# EAGLE board Swarm_Serial_Breakout-Panel (EAGLE 9.6.2), part 1 of 2
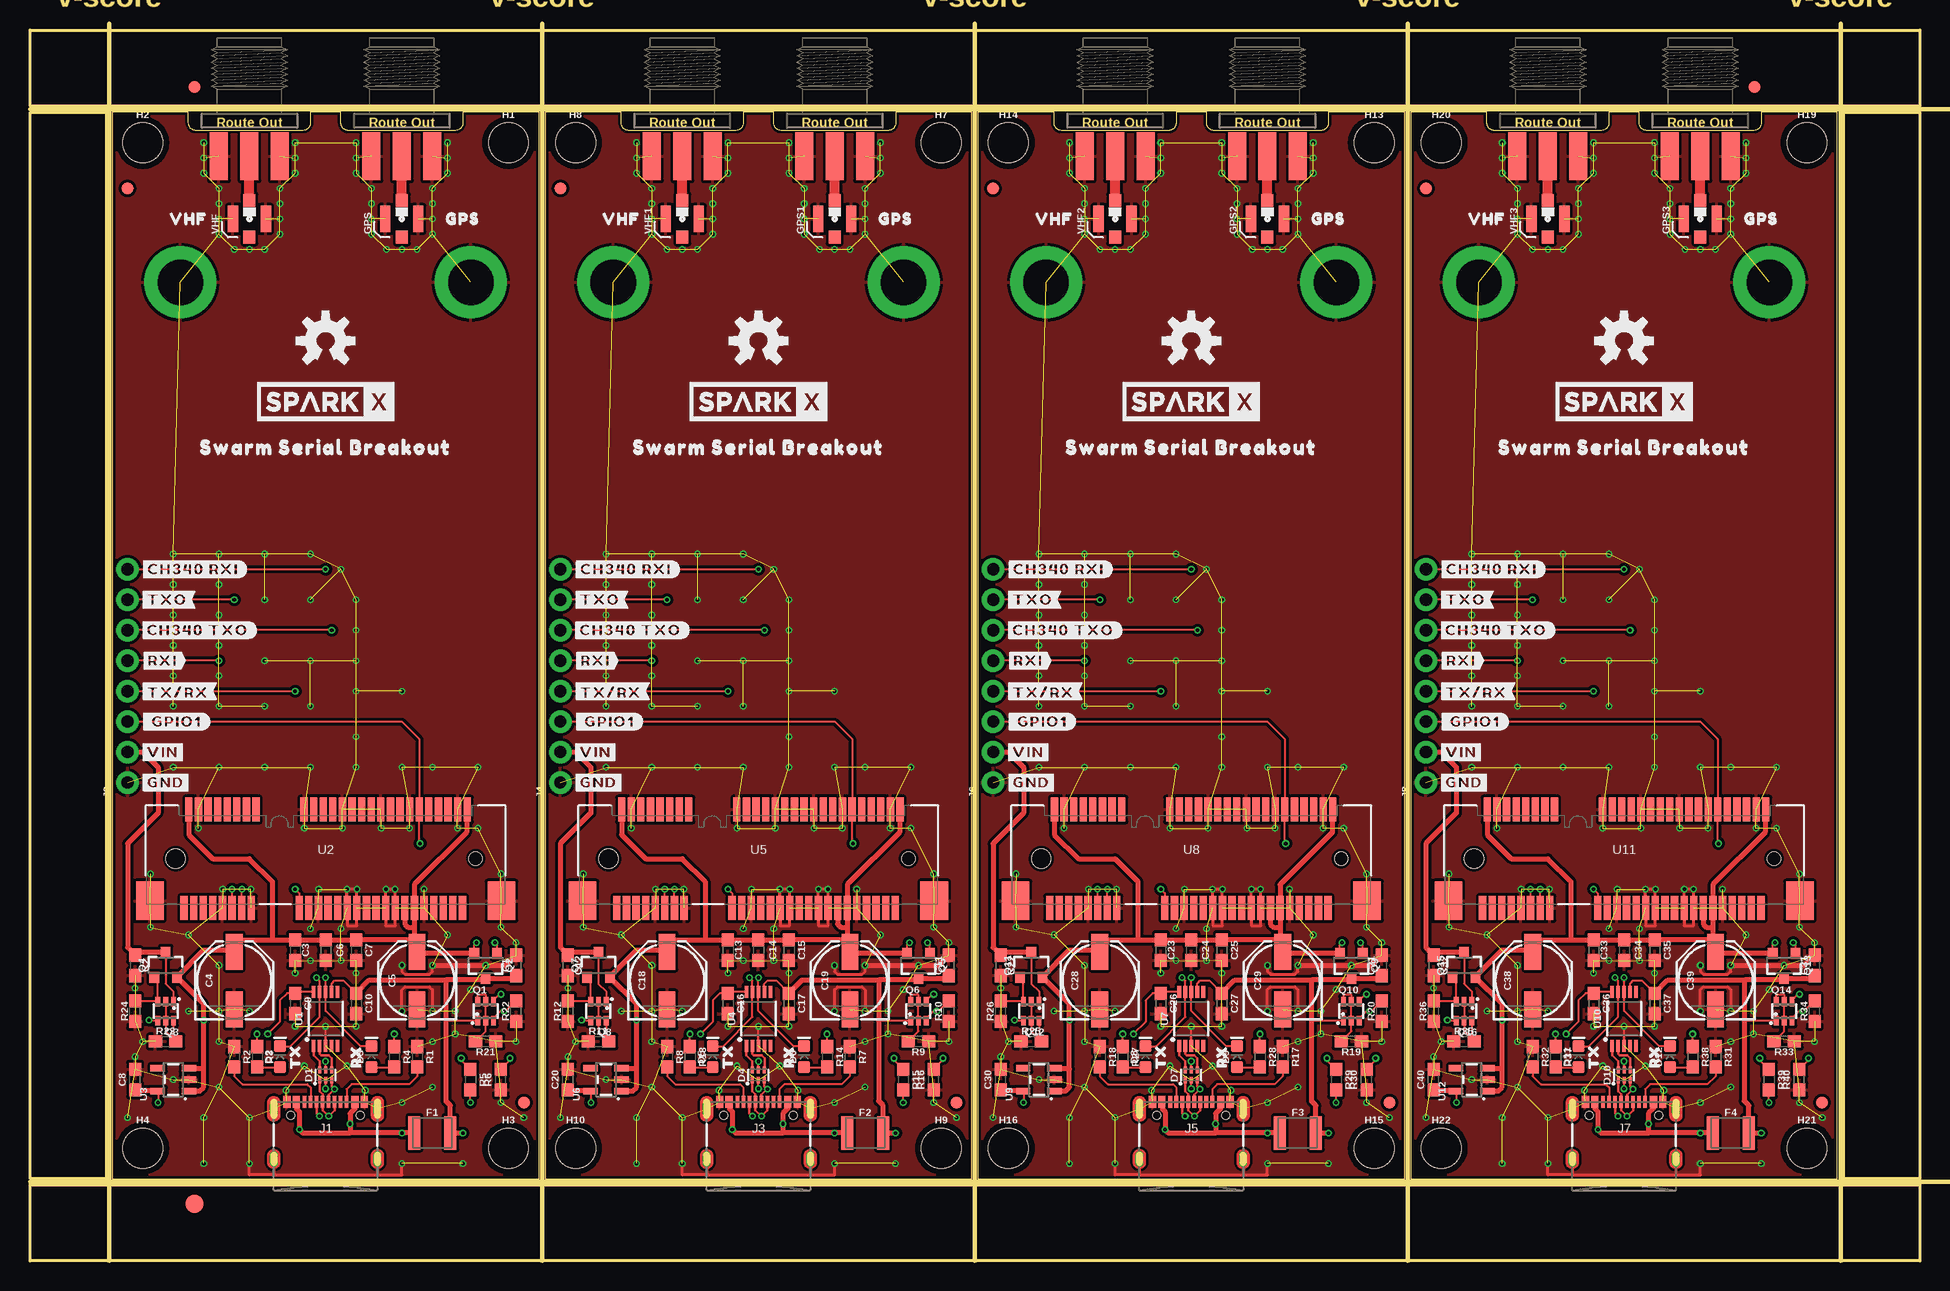
[diagram p0: board, top side]
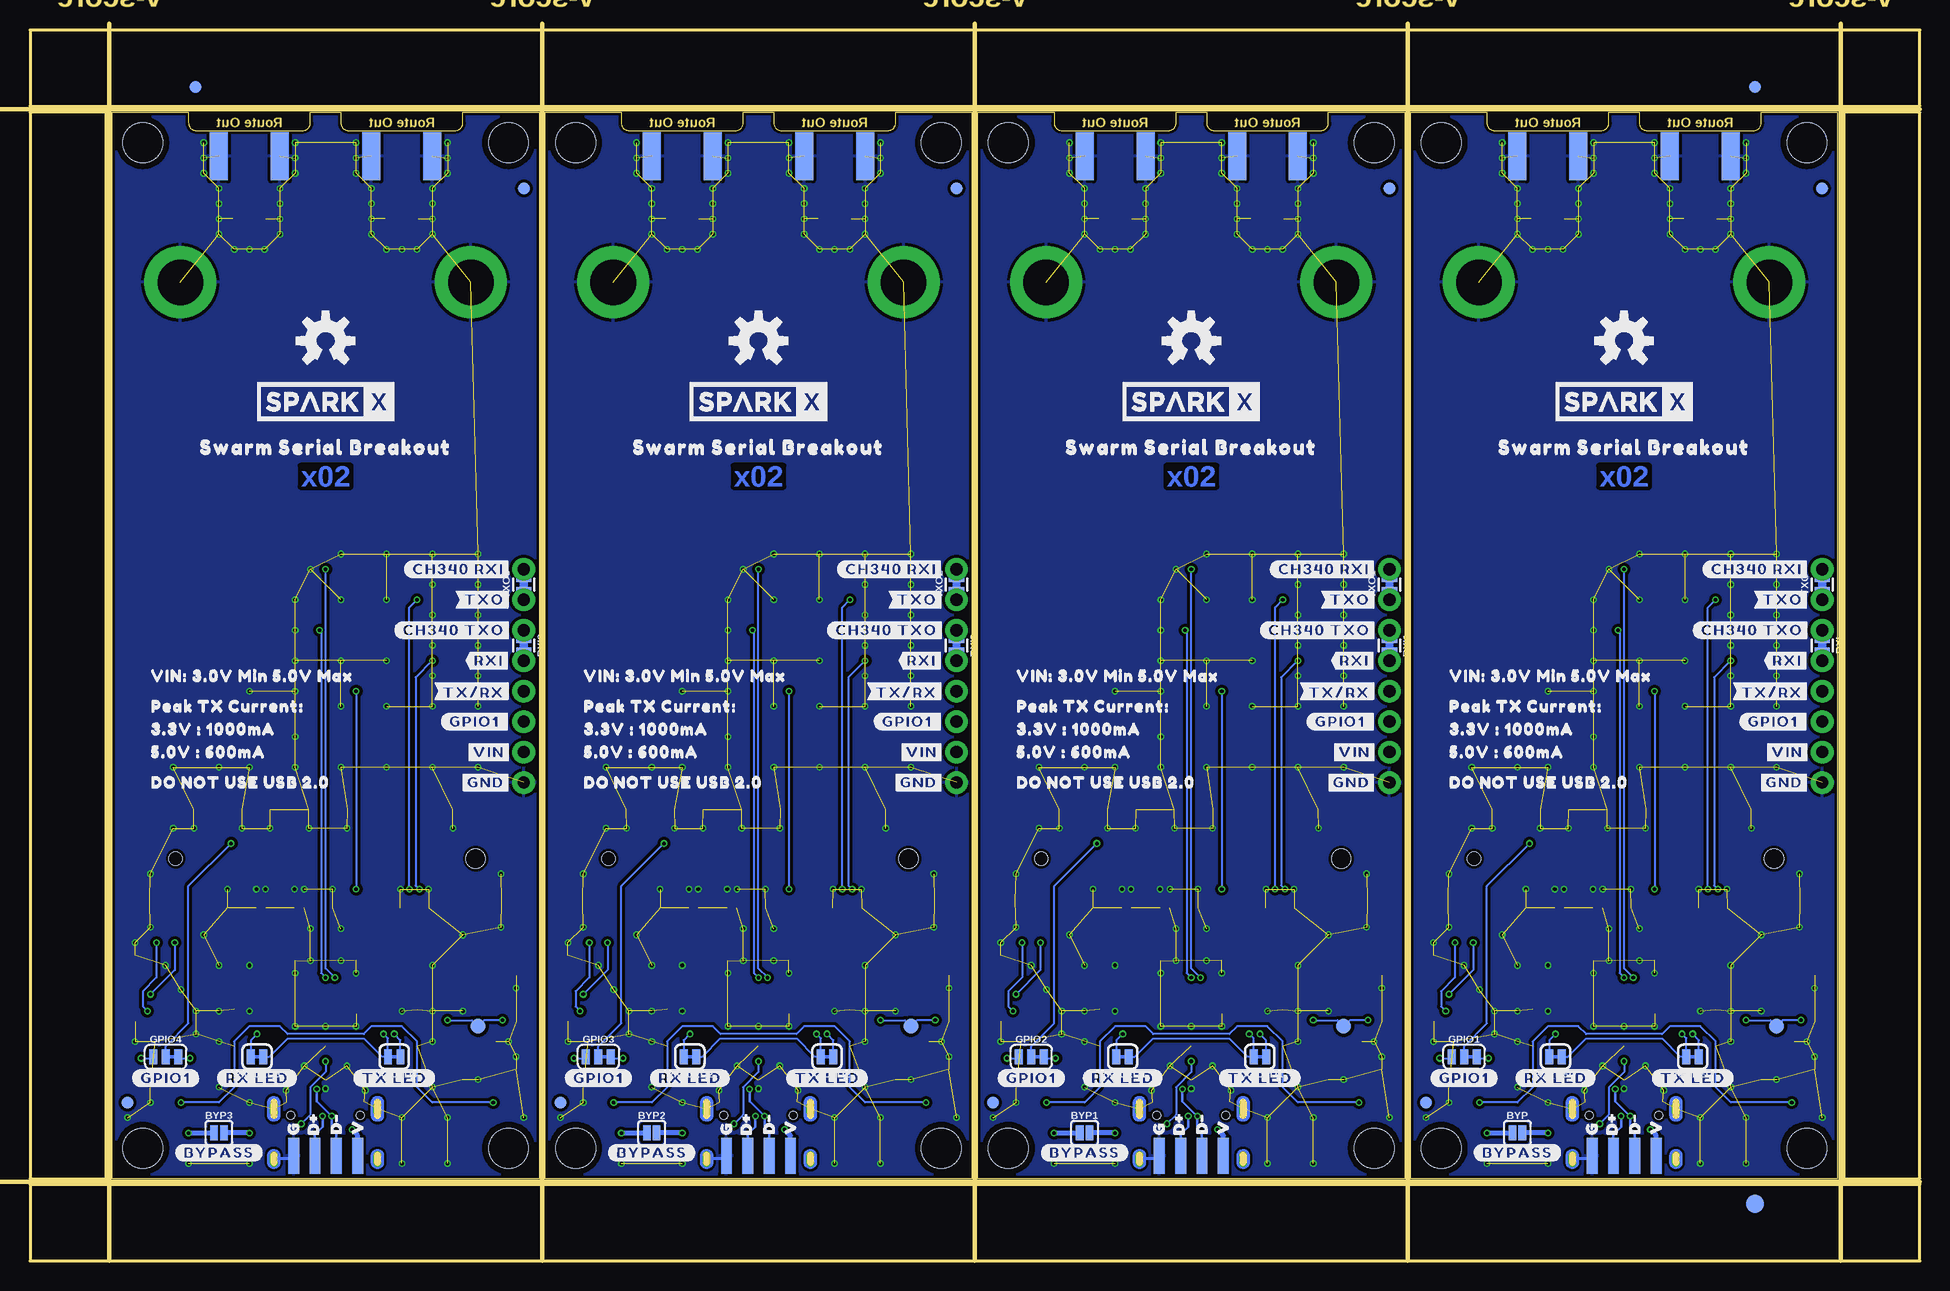
[diagram p1: board, bottom side, seen from below]

Size 157.48 x 102.62 mm. Coordinates in mm from the lower left corner, seen from the top.
Outline: 6.86,6.86 42.42,6.86 42.42,95.76 36.07,95.76 36.07,94.87 arc-90 35.43,94.23 26.54,94.23 arc-90 25.91,94.87 25.91,95.76 23.37,95.76 23.37,94.87 arc-90 22.73,94.23 13.84,94.23 arc-90 13.21,94.87 13.21,95.76 6.86,95.76 6.86,6.86
Outline: 42.93,6.86 78.49,6.86 78.49,95.76 72.14,95.76 72.14,94.87 arc-90 71.5,94.23 62.61,94.23 arc-90 61.98,94.87 61.98,95.76 59.44,95.76 59.44,94.87 arc-90 58.8,94.23 49.91,94.23 arc-90 49.28,94.87 49.28,95.76 42.93,95.76 42.93,6.86
Outline: 78.99,6.86 114.55,6.86 114.55,95.76 108.2,95.76 108.2,94.87 arc-90 107.57,94.23 98.68,94.23 arc-90 98.04,94.87 98.04,95.76 95.5,95.76 95.5,94.87 arc-90 94.87,94.23 85.98,94.23 arc-90 85.34,94.87 85.34,95.76 78.99,95.76 78.99,6.86
Outline: 115.06,6.86 150.62,6.86 150.62,95.76 144.27,95.76 144.27,94.87 arc-90 143.64,94.23 134.75,94.23 arc-90 134.11,94.87 134.11,95.76 131.57,95.76 131.57,94.87 arc-90 130.94,94.23 122.05,94.23 arc-90 121.41,94.87 121.41,95.76 115.06,95.76 115.06,6.86
Outline: 0,6.35 157.48,6.35 157.48,0 0,0 0,6.35
Outline: 151.13,95.76 157.48,95.76 157.48,6.86 151.13,6.86 151.13,95.76
Outline: 0,102.62 157.48,102.62 157.48,96.27 0,96.27 0,102.62
Outline: 0,95.76 6.35,95.76 6.35,6.86 0,6.86 0,95.76
Copper layers (1*16): Top 0.035mm / dielectric 1.5mm / Bottom 0.035mm
Design rules "Swarm_Serial_Breakout": minimum track width 5mil, minimum drill 0.3mm, track to track 5mil, track to pad 5mil, pad to pad 5mil, via to via 5mil, smd to smd 5mil, copper to edge 7mil, drill to drill 7mil, minimum pad ring 5mil, minimum via ring 5mil, stop-mask expansion 2.5mil, vias tented up to drill 25mil, thermal gap 10mil
tRestrict: area 17.5,86 to 19.1,87.8; area 30.2,86 to 31.8,87.8; area 53.6,86 to 55.1,87.8; area 66.3,86 to 67.8,87.8; area 89.7,86 to 91.2,87.8; area 102.4,86 to 103.9,87.8; area 125.7,86 to 127.3,87.8; area 138.4,86 to 140,87.8; 16 lines
bRestrict: 12 lines
Milling: 7 lines

## Footprints (pad centres in the part's own frame; a part is rotated, then mirrored left to right if it is on the bottom)
SMT-JUMPER_2_NO_SILK = smd 0.635 x 1.27: 1 -0.406,0; 2 0.406,0
0603 = smd 1.1 x 1: 1 -0.85,0; 2 0.85,0
PANASONIC_D = smd 3 x 1.4: + 2.4,0; - -2.4,0
SOT886 = smd 0.61 x 0.25: 1 -0.405,0.5 | smd 0.56 x 0.25: 2 -0.43,0; 3 -0.43,-0.5; 4 0.43,-0.5; 5 0.43,0; 6 0.43,0.5
LED-0603 = smd 1 x 1: A -0.877,0; C 0.877,0
SMA-EDGE = smd 1.5 x 4: GND@0 -2.54,0; GND@1 2.54,0; SIG 0,0 | smd 1.5 x 4 bottom: GND@2 -2.54,0; GND@3 2.54,0
FIDUCIAL-1X2 = smd 1 x 1: 1 0,0
FIDUCIAL-1.5X3 = smd 1.5 x 1.5: 1 0,0
1210 = smd 1 x 2.8: 1 -1.5,0; 2 1.5,0
SMT-JUMPER_3_1-NC_TRACE_SILK = smd 0.66 x 1.27: 1 -1.041,0; 2 0,0; 3 1.041,0
U.FL = smd 2.2 x 0.85: 1 0,1.375; 2 0,-1.375 | smd 1.05 x 1: FEED 1.525,0; NC -1.525,0
STAND-OFF = hole 3.302: 0,0
STAND-OFF-REFLOW-M2.5 = drill 3.8 pad 6: 1 0,0
USB-C-16P-2LAYER-PADS = smd 0.3 x 1: A5 -1.25,-0.34; A6 -0.25,-0.34; A7 0.25,-0.34; A8 1.25,-0.34; B5 1.75,-0.34; B6 0.75,-0.34; B7 -0.75,-0.34; B8 -1.75,-0.34 | smd 0.6 x 1: GND -3.225,-0.34; GND2 3.225,-0.34; VBUS1 -2.45,-0.34; VBUS2 2.45,-0.34 | drill 0.4 pad 0.6 long: SHLD1 -4.318,-0.915; SHLD2 4.318,-0.915; SHLD3 -4.318,-5.095; SHLD4 4.318,-5.095 | hole 0.65: -2.89,-1.445; 2.89,-1.445
1X04_NO_SILK = drill 1.016 pad 1.88: 1 0,0; 2 2.54,0; 3 5.08,0; 4 7.62,0
USB-SOLDER-PADS = smd 3 x 0.9: D+ 0,-0.889; D- 0,0.889; GND 0,-2.667; VBUS 0,2.667
SOT363_PHILIPS = smd 0.4 x 0.8: 1 -0.65,-0.8; 2 0,-0.8; 3 0.65,-0.8; 4 0.65,0.8; 5 0,0.8; 6 -0.65,0.8
SOT23-3 = smd 0.8 x 0.9: 1 -0.95,-1; 2 0.95,-1; 3 0,1.1
SMT-JUMPER_2_NC_TRACE_SILK = smd 0.66 x 1.27: 1 -0.521,0; 2 0.521,0
COMBO-JUMPER_2_NC_TRACE = smd 0.635 x 1.27: 1 -0.508,0; 2 0.508,0 | drill 1.016 pad 1.88: 3 -1.27,0; 4 1.27,0
MSOP10 = smd 1 x 0.3: 1 -2.25,1; 2 -2.25,0.5; 3 -2.25,0; 4 -2.25,-0.5; 5 -2.25,-1; 6 2.25,-1; 7 2.25,-0.5; 8 2.25,0; 9 2.25,0.5; 10 2.25,1
M.2-SWARM-M138-A = smd 0.6 x 2: 1 -11.8,-4.1; 2 -11.4,4.1; 3 -11,-4.1; 4 -10.6,4.1; 5 -10.2,-4.1; 6 -9.8,4.1; 7 -9.4,-4.1; 8 -9,4.1; 9 -8.6,-4.1; 10 -8.2,4.1; 11 -7.8,-4.1; 12 -7.4,4.1; 13 -7,-4.1; 14 -6.6,4.1; 15 -6.2,-4.1; 16 -5.8,4.1; 17 -2.2,-4.1; 18 -1.8,4.1; 19 -1.4,-4.1; 20 -1,4.1; 21 -0.6,-4.1; 22 -0.2,4.1; 23 0.2,-4.1; 24 0.6,4.1; 25 1,-4.1; 26 1.4,4.1; 27 1.8,-4.1; 28 2.2,4.1; 29 2.6,-4.1; 30 3,4.1; 31 3.4,-4.1; 32 3.8,4.1; 33 4.2,-4.1; 34 4.6,4.1; 35 5,-4.1; 36 5.4,4.1; 37 5.8,-4.1; 38 6.2,4.1; 39 6.6,-4.1; 40 7,4.1; 41 7.4,-4.1; 42 7.8,4.1; 43 8.2,-4.1; 44 8.6,4.1; 45 9,-4.1; 46 9.4,4.1; 47 9.8,-4.1; 48 10.2,4.1; 49 10.6,-4.1; 50 11,4.1; 51 11.4,-4.1; 52 11.8,4.1 | smd 2.3 x 3.2: A1 -14.65,-3.5; A2 14.65,-3.5 | hole 1.1: 12.5,0 | hole 1.6: -12.5,0
SOT23-5 = smd 0.55 x 1.2: 1 -0.95,-1.3; 2 0,-1.3; 3 0.95,-1.3; 4 0.95,1.3; 5 -0.95,1.3
PAD.03X.05 = smd 1.27 x 1.27: 1 0,0

## Placement (x,y rotation side)
BYP  JUMPER-SMT_2_NO_SILK  [SMT-JUMPER_2_NO_SILK]  33.53,10.67 0 bottom
BYP1  JUMPER-SMT_2_NO_SILK  [SMT-JUMPER_2_NO_SILK]  69.6,10.67 0 bottom
BYP2  JUMPER-SMT_2_NO_SILK  [SMT-JUMPER_2_NO_SILK]  105.66,10.67 0 bottom
BYP3  JUMPER-SMT_2_NO_SILK  [SMT-JUMPER_2_NO_SILK]  141.73,10.67 0 bottom
C1  0.1uF  [0603]  40.51,24.64 90 top
C2  0.1uF  [0603]  8.76,24.64 270 top
C3  0.1uF  [0603]  22.1,25.91 270 top
C4  100uF  [PANASONIC_D]  17.02,23.37 90 top
C5  100uF  [PANASONIC_D]  32.26,23.37 90 top
C6  10uF  [0603]  24.64,25.91 270 top
C7  0.1uF  [0603]  27.18,25.91 270 top
C8  1.0uF  [0603]  8.76,15.11 90 top
C9  0.1uF  [0603]  22.1,21.46 270 top
C10  10nF  [0603]  27.18,21.46 270 top
C11  0.1uF  [0603]  76.58,24.64 90 top
C12  0.1uF  [0603]  44.83,24.64 270 top
C13  0.1uF  [0603]  58.17,25.91 270 top
C14  10uF  [0603]  60.71,25.91 270 top
C15  0.1uF  [0603]  63.25,25.91 270 top
C16  0.1uF  [0603]  58.17,21.46 270 top
C17  10nF  [0603]  63.25,21.46 270 top
C18  100uF  [PANASONIC_D]  53.09,23.37 90 top
C19  100uF  [PANASONIC_D]  68.33,23.37 90 top
C20  1.0uF  [0603]  44.83,15.11 90 top
C21  0.1uF  [0603]  112.65,24.64 90 top
C22  0.1uF  [0603]  80.9,24.64 270 top
C23  0.1uF  [0603]  94.23,25.91 270 top
C24  10uF  [0603]  96.77,25.91 270 top
C25  0.1uF  [0603]  99.31,25.91 270 top
C26  0.1uF  [0603]  94.23,21.46 270 top
C27  10nF  [0603]  99.31,21.46 270 top
C28  100uF  [PANASONIC_D]  89.15,23.37 90 top
C29  100uF  [PANASONIC_D]  104.39,23.37 90 top
C30  1.0uF  [0603]  80.9,15.11 90 top
C31  0.1uF  [0603]  148.72,24.64 90 top
C32  0.1uF  [0603]  116.97,24.64 270 top
C33  0.1uF  [0603]  130.3,25.91 270 top
C34  10uF  [0603]  132.84,25.91 270 top
C35  0.1uF  [0603]  135.38,25.91 270 top
C36  0.1uF  [0603]  130.3,21.46 270 top
C37  10nF  [0603]  135.38,21.46 270 top
C38  100uF  [PANASONIC_D]  125.22,23.37 90 top
C39  100uF  [PANASONIC_D]  140.46,23.37 90 top
C40  1.0uF  [0603]  116.97,15.11 90 top
D1  PRTR5V0U2F  [SOT886]  24.64,15.49 90 top
D2  GREEN  [LED-0603]  20.83,17.02 90 top
D3  Yellow  [LED-0603]  28.45,17.02 90 top
D4  PRTR5V0U2F  [SOT886]  60.71,15.49 90 top
D5  GREEN  [LED-0603]  56.9,17.02 90 top
D6  Yellow  [LED-0603]  64.52,17.02 90 top
D7  PRTR5V0U2F  [SOT886]  96.77,15.49 90 top
D8  GREEN  [LED-0603]  92.96,17.02 90 top
D9  Yellow  [LED-0603]  100.58,17.02 90 top
D10  PRTR5V0U2F  [SOT886]  132.84,15.49 90 top
D11  GREEN  [LED-0603]  129.03,17.02 90 top
D12  Yellow  [LED-0603]  136.65,17.02 90 top
E1  VHF  [SMA-EDGE]  18.29,92.08 0 top
E2  GPS  [SMA-EDGE]  30.99,92.08 0 top
E3  VHF  [SMA-EDGE]  54.36,92.08 0 top
E4  GPS  [SMA-EDGE]  67.06,92.08 0 top
E5  VHF  [SMA-EDGE]  90.42,92.08 0 top
E6  GPS  [SMA-EDGE]  103.12,92.08 0 top
E7  VHF  [SMA-EDGE]  126.49,92.08 0 top
E8  GPS  [SMA-EDGE]  139.19,92.08 0 top
E$1  [FIDUCIAL-1X2]  13.72,97.85 0 top
E$2  [FIDUCIAL-1X2]  13.72,97.85 0 bottom
E$3  [FIDUCIAL-1X2]  143.7,97.85 0 top
E$4  [FIDUCIAL-1X2]  143.7,97.85 0 bottom
E$5  [FIDUCIAL-1.5X3]  13.72,4.76 0 top
E$6  [FIDUCIAL-1.5X3]  13.72,4.76 0 bottom
F1  6V/2A  [1210]  33.53,10.67 0 top
F2  6V/2A  [1210]  69.6,10.67 0 top
F3  6V/2A  [1210]  105.66,10.67 0 top
F4  6V/2A  [1210]  141.73,10.67 0 top
FD1  FIDUCIAL1X2  [FIDUCIAL-1X2]  41.15,13.21 0 top
FD2  FIDUCIAL1X2  [FIDUCIAL-1X2]  41.15,13.21 0 bottom
FD3  FIDUCIAL1X2  [FIDUCIAL-1X2]  8.13,89.41 0 top
FD4  FIDUCIAL1X2  [FIDUCIAL-1X2]  8.13,89.41 0 bottom
FD5  FIDUCIAL1X2  [FIDUCIAL-1X2]  77.22,13.21 0 top
FD6  FIDUCIAL1X2  [FIDUCIAL-1X2]  77.22,13.21 0 bottom
FD7  FIDUCIAL1X2  [FIDUCIAL-1X2]  44.2,89.41 0 top
FD8  FIDUCIAL1X2  [FIDUCIAL-1X2]  44.2,89.41 0 bottom
FD9  FIDUCIAL1X2  [FIDUCIAL-1X2]  113.28,13.21 0 top
FD10  FIDUCIAL1X2  [FIDUCIAL-1X2]  113.28,13.21 0 bottom
FD11  FIDUCIAL1X2  [FIDUCIAL-1X2]  80.26,89.41 0 top
FD12  FIDUCIAL1X2  [FIDUCIAL-1X2]  80.26,89.41 0 bottom
FD13  FIDUCIAL1X2  [FIDUCIAL-1X2]  149.35,13.21 0 top
FD14  FIDUCIAL1X2  [FIDUCIAL-1X2]  149.35,13.21 0 bottom
FD15  FIDUCIAL1X2  [FIDUCIAL-1X2]  116.33,89.41 0 top
FD16  FIDUCIAL1X2  [FIDUCIAL-1X2]  116.33,89.41 0 bottom
GPIO1  JUMPER-SMT_3_1-NC_TRACE_SILK  [SMT-JUMPER_3_1-NC_TRACE_SILK]  37.97,17.02 0 bottom
GPIO2  JUMPER-SMT_3_1-NC_TRACE_SILK  [SMT-JUMPER_3_1-NC_TRACE_SILK]  74.04,17.02 0 bottom
GPIO3  JUMPER-SMT_3_1-NC_TRACE_SILK  [SMT-JUMPER_3_1-NC_TRACE_SILK]  110.11,17.02 0 bottom
GPIO4  JUMPER-SMT_3_1-NC_TRACE_SILK  [SMT-JUMPER_3_1-NC_TRACE_SILK]  146.18,17.02 0 bottom
GPS  U.FL  [U.FL]  30.99,86.87 90 top
GPS1  U.FL  [U.FL]  67.06,86.87 90 top
GPS2  U.FL  [U.FL]  103.12,86.87 90 top
GPS3  U.FL  [U.FL]  139.19,86.87 90 top
H1  STAND-OFF  [STAND-OFF]  39.88,93.22 0 top
H2  STAND-OFF  [STAND-OFF]  9.4,93.22 0 top
H3  STAND-OFF  [STAND-OFF]  39.88,9.4 0 top
H4  STAND-OFF  [STAND-OFF]  9.4,9.4 0 top
H5  STAND-OFF-REFLOW-M2.5_2.5MM_TALL  [STAND-OFF-REFLOW-M2.5]  12.54,81.58 0 top
H6  STAND-OFF-REFLOW-M2.5_2.5MM_TALL  [STAND-OFF-REFLOW-M2.5]  36.74,81.58 0 top
H7  STAND-OFF  [STAND-OFF]  75.95,93.22 0 top
H8  STAND-OFF  [STAND-OFF]  45.47,93.22 0 top
H9  STAND-OFF  [STAND-OFF]  75.95,9.4 0 top
H10  STAND-OFF  [STAND-OFF]  45.47,9.4 0 top
H11  STAND-OFF-REFLOW-M2.5_2.5MM_TALL  [STAND-OFF-REFLOW-M2.5]  48.61,81.58 0 top
H12  STAND-OFF-REFLOW-M2.5_2.5MM_TALL  [STAND-OFF-REFLOW-M2.5]  72.81,81.58 0 top
H13  STAND-OFF  [STAND-OFF]  112.01,93.22 0 top
H14  STAND-OFF  [STAND-OFF]  81.53,93.22 0 top
H15  STAND-OFF  [STAND-OFF]  112.01,9.4 0 top
H16  STAND-OFF  [STAND-OFF]  81.53,9.4 0 top
H17  STAND-OFF-REFLOW-M2.5_2.5MM_TALL  [STAND-OFF-REFLOW-M2.5]  84.67,81.58 0 top
H18  STAND-OFF-REFLOW-M2.5_2.5MM_TALL  [STAND-OFF-REFLOW-M2.5]  108.87,81.58 0 top
H19  STAND-OFF  [STAND-OFF]  148.08,93.22 0 top
H20  STAND-OFF  [STAND-OFF]  117.6,93.22 0 top
H21  STAND-OFF  [STAND-OFF]  148.08,9.4 0 top
H22  STAND-OFF  [STAND-OFF]  117.6,9.4 0 top
H23  STAND-OFF-REFLOW-M2.5_2.5MM_TALL  [STAND-OFF-REFLOW-M2.5]  120.74,81.58 0 top
H24  STAND-OFF-REFLOW-M2.5_2.5MM_TALL  [STAND-OFF-REFLOW-M2.5]  144.94,81.58 0 top
J1  [USB-C-16P-2LAYER-PADS]  24.64,13.59 0 top
J2  [1X04_NO_SILK]  8.13,39.88 90 top
J3  [USB-C-16P-2LAYER-PADS]  60.71,13.59 0 top
J4  [1X04_NO_SILK]  44.2,39.88 90 top
J5  [USB-C-16P-2LAYER-PADS]  96.77,13.59 0 top
J6  [1X04_NO_SILK]  80.26,39.88 90 top
J7  [USB-C-16P-2LAYER-PADS]  132.84,13.59 0 top
J8  [1X04_NO_SILK]  116.33,39.88 90 top
JP1  USB_SOLDER_PADS  [USB-SOLDER-PADS]  24.64,8.76 270 bottom
JP2  USB_SOLDER_PADS  [USB-SOLDER-PADS]  60.71,8.76 270 bottom
JP3  USB_SOLDER_PADS  [USB-SOLDER-PADS]  96.77,8.76 270 bottom
JP4  USB_SOLDER_PADS  [USB-SOLDER-PADS]  132.84,8.76 270 bottom
LOGO1  OSHW-LOGOM  [OSHW-LOGO-M]  60.71,76.71 0 top
LOGO2  OSHW-LOGOM  [OSHW-LOGO-M]  24.64,76.71 0 top
LOGO3  OSHW-LOGOM  [OSHW-LOGO-M]  24.64,76.71 0 bottom
LOGO4  OSHW-LOGOM  [OSHW-LOGO-M]  60.71,76.71 0 bottom
LOGO5  OSHW-LOGOM  [OSHW-LOGO-M]  96.77,76.71 0 top
LOGO6  OSHW-LOGOM  [OSHW-LOGO-M]  96.77,76.71 0 bottom
LOGO7  OSHW-LOGOM  [OSHW-LOGO-M]  132.84,76.71 0 top
LOGO8  OSHW-LOGOM  [OSHW-LOGO-M]  132.84,76.71 0 bottom
Q1  [SOT363_PHILIPS]  37.97,20.83 0 top
Q2  20V/4.2A/52mΩ/1.4W  [SOT23-3]  37.97,24.64 180 top
Q3  [SOT363_PHILIPS]  11.3,20.83 180 top
Q4  20V/4.2A/52mΩ/1.4W  [SOT23-3]  11.3,24.64 0 top
Q5  20V/4.2A/52mΩ/1.4W  [SOT23-3]  74.04,24.64 180 top
Q6  [SOT363_PHILIPS]  74.04,20.83 0 top
Q7  20V/4.2A/52mΩ/1.4W  [SOT23-3]  47.37,24.64 0 top
Q8  [SOT363_PHILIPS]  47.37,20.83 180 top
Q9  20V/4.2A/52mΩ/1.4W  [SOT23-3]  110.11,24.64 180 top
Q10  [SOT363_PHILIPS]  110.11,20.83 0 top
Q11  20V/4.2A/52mΩ/1.4W  [SOT23-3]  83.44,24.64 0 top
Q12  [SOT363_PHILIPS]  83.44,20.83 180 top
Q13  20V/4.2A/52mΩ/1.4W  [SOT23-3]  146.18,24.64 180 top
Q14  [SOT363_PHILIPS]  146.18,20.83 0 top
Q15  20V/4.2A/52mΩ/1.4W  [SOT23-3]  119.51,24.64 0 top
Q16  [SOT363_PHILIPS]  119.51,20.83 180 top
R1  5.1k  [0603]  32.26,17.02 270 top
R2  5.1k  [0603]  17.02,17.02 270 top
R3  100  [0603]  18.92,17.02 270 top
R4  100  [0603]  30.35,17.02 270 top
R5  100k  [0603]  36.7,15.11 270 top
R6  100k  [0603]  39.24,15.11 90 top
R7  5.1k  [0603]  68.33,17.02 270 top
R8  5.1k  [0603]  53.09,17.02 270 top
R9  100k  [0603]  74.04,18.29 180 top
R10  1M  [0603]  76.58,20.83 90 top
R11  100k  [0603]  47.37,18.29 0 top
R12  1M  [0603]  44.83,20.83 90 top
R13  100  [0603]  54.99,17.02 270 top
R14  100  [0603]  66.42,17.02 270 top
R15  100k  [0603]  72.77,15.11 270 top
R16  100k  [0603]  75.31,15.11 90 top
R17  5.1k  [0603]  104.39,17.02 270 top
R18  5.1k  [0603]  89.15,17.02 270 top
R19  100k  [0603]  110.11,18.29 180 top
R20  1M  [0603]  112.65,20.83 90 top
R21  100k  [0603]  37.97,18.29 180 top
R22  1M  [0603]  40.51,20.83 90 top
R23  100k  [0603]  11.3,18.29 0 top
R24  1M  [0603]  8.76,20.83 90 top
R25  100k  [0603]  83.44,18.29 0 top
R26  1M  [0603]  80.9,20.83 90 top
R27  100  [0603]  91.06,17.02 270 top
R28  100  [0603]  102.49,17.02 270 top
R29  100k  [0603]  108.84,15.11 270 top
R30  100k  [0603]  111.38,15.11 90 top
R31  5.1k  [0603]  140.46,17.02 270 top
R32  5.1k  [0603]  125.22,17.02 270 top
R33  100k  [0603]  146.18,18.29 180 top
R34  1M  [0603]  148.72,20.83 90 top
R35  100k  [0603]  119.51,18.29 0 top
R36  1M  [0603]  116.97,20.83 90 top
R37  100  [0603]  127.13,17.02 270 top
R38  100  [0603]  138.56,17.02 270 top
R39  100k  [0603]  144.91,15.11 270 top
R40  100k  [0603]  147.45,15.11 90 top
RX_LED  JUMPER-SMT_2_NC_TRACE_SILK  [SMT-JUMPER_2_NC_TRACE_SILK]  30.35,17.02 180 bottom
RX_LED1  JUMPER-SMT_2_NC_TRACE_SILK  [SMT-JUMPER_2_NC_TRACE_SILK]  66.42,17.02 180 bottom
RX_LED2  JUMPER-SMT_2_NC_TRACE_SILK  [SMT-JUMPER_2_NC_TRACE_SILK]  102.49,17.02 180 bottom
RX_LED3  JUMPER-SMT_2_NC_TRACE_SILK  [SMT-JUMPER_2_NC_TRACE_SILK]  138.56,17.02 180 bottom
RXI  JUMPER-COMBO_2_NC_TRACE  [COMBO-JUMPER_2_NC_TRACE]  8.13,51.31 270 bottom
RXI1  JUMPER-COMBO_2_NC_TRACE  [COMBO-JUMPER_2_NC_TRACE]  44.2,51.31 270 bottom
RXI2  JUMPER-COMBO_2_NC_TRACE  [COMBO-JUMPER_2_NC_TRACE]  80.26,51.31 270 bottom
RXI3  JUMPER-COMBO_2_NC_TRACE  [COMBO-JUMPER_2_NC_TRACE]  116.33,51.31 270 bottom
TX_LED  JUMPER-SMT_2_NC_TRACE_SILK  [SMT-JUMPER_2_NC_TRACE_SILK]  18.92,17.02 180 bottom
TX_LED1  JUMPER-SMT_2_NC_TRACE_SILK  [SMT-JUMPER_2_NC_TRACE_SILK]  54.99,17.02 180 bottom
TX_LED2  JUMPER-SMT_2_NC_TRACE_SILK  [SMT-JUMPER_2_NC_TRACE_SILK]  91.06,17.02 180 bottom
TX_LED3  JUMPER-SMT_2_NC_TRACE_SILK  [SMT-JUMPER_2_NC_TRACE_SILK]  127.13,17.02 180 bottom
TXO  JUMPER-COMBO_2_NC_TRACE  [COMBO-JUMPER_2_NC_TRACE]  8.13,56.39 90 bottom
TXO1  JUMPER-COMBO_2_NC_TRACE  [COMBO-JUMPER_2_NC_TRACE]  44.2,56.39 90 bottom
TXO2  JUMPER-COMBO_2_NC_TRACE  [COMBO-JUMPER_2_NC_TRACE]  80.26,56.39 90 bottom
TXO3  JUMPER-COMBO_2_NC_TRACE  [COMBO-JUMPER_2_NC_TRACE]  116.33,56.39 90 bottom
U1  CH340E_MSOP10  [MSOP10]  24.64,20.19 90 top
U2  SWARM_M138_TRANSCEIVER_MAIN  [M.2-SWARM-M138-A]  24.64,33.53 0 top
U3  STLQ015-3.3V  [SOT23-5]  11.94,15.11 90 top
U4  CH340E_MSOP10  [MSOP10]  60.71,20.19 90 top
U5  SWARM_M138_TRANSCEIVER_MAIN  [M.2-SWARM-M138-A]  60.71,33.53 0 top
U6  STLQ015-3.3V  [SOT23-5]  48.01,15.11 90 top
U7  CH340E_MSOP10  [MSOP10]  96.77,20.19 90 top
U8  SWARM_M138_TRANSCEIVER_MAIN  [M.2-SWARM-M138-A]  96.77,33.53 0 top
U9  STLQ015-3.3V  [SOT23-5]  84.07,15.11 90 top
U10  CH340E_MSOP10  [MSOP10]  132.84,20.19 90 top
U11  SWARM_M138_TRANSCEIVER_MAIN  [M.2-SWARM-M138-A]  132.84,33.53 0 top
U12  STLQ015-3.3V  [SOT23-5]  120.14,15.11 90 top
U$1  SPARKX-LOGO5  [SPARKX-LARGE]  24.64,71.63 0 bottom
U$2  SPARKX-LOGO5  [SPARKX-LARGE]  24.64,71.63 0 top
U$3  [VHF0]  13.21,86.87 0 top
U$4  [GPS0]  36.07,86.87 0 top
U$5  [SWARM_SERIAL_BREAKOUT0]  24.64,67.82 0 top
U$6  [SWARM_SERIAL_BREAKOUT0]  24.64,67.82 0 bottom
U$7  [#CH340_RXI#0]  13.59,57.66 0 top
U$8  [#CH340_RXI#341]  13.59,57.66 0 bottom
U$9  [#TXO#341]  11.43,55.12 0 top
U$10  [#TXO#342]  11.43,55.12 0 bottom
U$11  [#CH340_TXO#0]  13.97,52.58 0 top
U$12  [#CH340_TXO#341]  13.97,52.58 0 bottom
U$13  [#RXI#0]  11.05,50.04 0 bottom
U$14  [#RXI#1]  11.05,50.04 0 top
U$15  [#TX##RX##1]  12.32,47.5 0 bottom
U$16  [#TX##RX##0]  12.32,47.5 0 top
U$17  [#GPIO1_#2]  12.06,44.96 0 bottom
U$18  [V0]  21.97,11.18 90 bottom
U$19  [#GPIO1#0]  37.97,15.24 0 bottom
U$20  [#_GPIO1#2]  12.06,44.96 0 top
U$21  [#VIN#0]  11.05,42.42 0 top
U$22  [#VIN#0]  11.05,42.42 0 bottom
U$23  [#GND#0]  11.3,39.88 0 top
U$24  [#GND#0]  11.3,39.88 0 bottom
U$25  [TX0]  22.1,17.02 90 top
U$26  [RX0]  27.18,17.02 90 top
U$27  [#TX_LED#0]  18.92,15.24 0 bottom
U$28  [#RX_LED#0]  30.35,15.24 0 bottom
U$29  [#BYPASS#0]  33.53,9.02 0 bottom
U$30  [G3]  27.3,11.05 90 bottom
U$31  [3#3V_#_1000MA0]  39.88,44.32 0 bottom
U$32  [PEAK_TX_CURRENT#0]  39.88,46.23 0 bottom
U$33  [5#0V_#_600MA0]  39.88,42.42 0 bottom
U$34  SPARKX-LOGO5  [SPARKX-LARGE]  60.71,71.63 0 bottom
U$35  [DO_NOT_USE_USB_2#00]  39.88,39.88 0 bottom
U$36  [D#2]  25.65,11.43 90 bottom
U$37  [D#1]  23.75,11.43 90 bottom
U$38  [VIN#_3#0V_MIN_5#0V_MAX0]  39.88,48.77 0 bottom
U$39  SPARKX-LOGO5  [SPARKX-LARGE]  60.71,71.63 0 top
U$40  [VHF0]  49.28,86.87 0 top
U$41  [GPS0]  72.14,86.87 0 top
U$42  [SWARM_SERIAL_BREAKOUT0]  60.71,67.82 0 top
U$43  [SWARM_SERIAL_BREAKOUT0]  60.71,67.82 0 bottom
U$44  [#VIN#0]  47.12,42.42 0 top
U$45  [#VIN#0]  47.12,42.42 0 bottom
U$46  [#GND#0]  47.37,39.88 0 top
U$47  [#GND#0]  47.37,39.88 0 bottom
U$48  [TX0]  58.17,17.02 90 top
U$49  [RX0]  63.25,17.02 90 top
U$50  [#TX_LED#0]  54.99,15.24 0 bottom
U$51  [#RX_LED#0]  66.42,15.24 0 bottom
U$52  [#BYPASS#0]  69.6,9.02 0 bottom
U$53  [PEAK_TX_CURRENT#0]  75.95,46.23 0 bottom
U$54  [DO_NOT_USE_USB_2#00]  75.95,39.88 0 bottom
U$55  [#CH340_RXI#0]  49.66,57.66 0 top
U$56  [#CH340_RXI#341]  49.66,57.66 0 bottom
U$57  [#TXO#341]  47.5,55.12 0 top
U$58  [#TXO#342]  47.5,55.12 0 bottom
U$59  [#CH340_TXO#0]  50.04,52.58 0 top
U$60  [#CH340_TXO#341]  50.04,52.58 0 bottom
U$61  [#RXI#0]  47.12,50.04 0 bottom
U$62  [#RXI#1]  47.12,50.04 0 top
U$63  [#TX##RX##0]  48.39,47.5 0 top
U$64  [#TX##RX##1]  48.39,47.5 0 bottom
U$65  [#GPIO1#0]  74.04,15.24 0 bottom
U$66  [#GPIO1_#2]  48.13,44.96 0 bottom
U$67  [#_GPIO1#2]  48.13,44.96 0 top
U$68  [V0]  58.04,11.18 90 bottom
U$69  [G3]  63.37,11.05 90 bottom
U$70  [D#2]  61.72,11.43 90 bottom
U$71  [D#1]  59.82,11.43 90 bottom
U$72  [VIN#_3#0V_MIN_5#0V_MAX0]  75.95,48.77 0 bottom
U$73  [3#3V_#_1000MA0]  75.95,44.32 0 bottom
U$74  [5#0V_#_600MA0]  75.95,42.42 0 bottom
U$75  SPARKX-LOGO5  [SPARKX-LARGE]  96.77,71.63 0 bottom
U$76  SPARKX-LOGO5  [SPARKX-LARGE]  96.77,71.63 0 top
U$77  [VHF0]  85.34,86.87 0 top
U$78  [GPS0]  108.2,86.87 0 top
U$79  [SWARM_SERIAL_BREAKOUT0]  96.77,67.82 0 top
U$80  [SWARM_SERIAL_BREAKOUT0]  96.77,67.82 0 bottom
U$81  [#VIN#0]  83.19,42.42 0 top
U$82  [#VIN#0]  83.19,42.42 0 bottom
U$83  [#GND#0]  83.44,39.88 0 top
U$84  [#GND#0]  83.44,39.88 0 bottom
U$85  [TX0]  94.23,17.02 90 top
U$86  [RX0]  99.31,17.02 90 top
U$87  [#TX_LED#0]  91.06,15.24 0 bottom
U$88  [#RX_LED#0]  102.49,15.24 0 bottom
U$89  [#BYPASS#0]  105.66,9.02 0 bottom
U$90  [PEAK_TX_CURRENT#0]  112.01,46.23 0 bottom
U$91  [DO_NOT_USE_USB_2#00]  112.01,39.88 0 bottom
U$92  [#CH340_RXI#0]  85.73,57.66 0 top
U$93  [#CH340_RXI#341]  85.73,57.66 0 bottom
U$94  [#TXO#341]  83.57,55.12 0 top
U$95  [#TXO#342]  83.57,55.12 0 bottom
U$96  [#CH340_TXO#0]  86.11,52.58 0 top
U$97  [#CH340_TXO#341]  86.11,52.58 0 bottom
U$98  [#RXI#0]  83.19,50.04 0 bottom
U$99  [#RXI#1]  83.19,50.04 0 top
U$100  [#TX##RX##0]  84.45,47.5 0 top
U$101  [#TX##RX##1]  84.45,47.5 0 bottom
U$102  [#GPIO1#0]  110.11,15.24 0 bottom
U$103  [#GPIO1_#2]  84.2,44.96 0 bottom
U$104  [#_GPIO1#2]  84.2,44.96 0 top
U$105  [V0]  94.11,11.18 90 bottom
U$106  [G3]  99.44,11.05 90 bottom
U$107  [D#2]  97.79,11.43 90 bottom
U$108  [D#1]  95.89,11.43 90 bottom
U$109  [VIN#_3#0V_MIN_5#0V_MAX0]  112.01,48.77 0 bottom
U$110  [3#3V_#_1000MA0]  112.01,44.32 0 bottom
U$111  [5#0V_#_600MA0]  112.01,42.42 0 bottom
U$112  SPARKX-LOGO5  [SPARKX-LARGE]  132.84,71.63 0 bottom
U$113  SPARKX-LOGO5  [SPARKX-LARGE]  132.84,71.63 0 top
U$114  [VHF0]  121.41,86.87 0 top
U$115  [GPS0]  144.27,86.87 0 top
U$116  [SWARM_SERIAL_BREAKOUT0]  132.84,67.82 0 top
U$117  [SWARM_SERIAL_BREAKOUT0]  132.84,67.82 0 bottom
U$118  [#VIN#0]  119.25,42.42 0 top
U$119  [#VIN#0]  119.25,42.42 0 bottom
U$120  [#GND#0]  119.51,39.88 0 top
U$121  [#GND#0]  119.51,39.88 0 bottom
U$122  [TX0]  130.3,17.02 90 top
U$123  [RX0]  135.38,17.02 90 top
U$124  [#TX_LED#0]  127.13,15.24 0 bottom
U$125  [#RX_LED#0]  138.56,15.24 0 bottom
U$126  [#BYPASS#0]  141.73,9.02 0 bottom
U$127  [PEAK_TX_CURRENT#0]  148.08,46.23 0 bottom
U$128  [DO_NOT_USE_USB_2#00]  148.08,39.88 0 bottom
U$129  [#CH340_RXI#0]  121.79,57.66 0 top
U$130  [#CH340_RXI#341]  121.79,57.66 0 bottom
U$131  [#TXO#341]  119.63,55.12 0 top
U$132  [#TXO#342]  119.63,55.12 0 bottom
U$133  [#CH340_TXO#0]  122.17,52.58 0 top
U$134  [#CH340_TXO#341]  122.17,52.58 0 bottom
U$135  [#RXI#0]  119.25,50.04 0 bottom
U$136  [#RXI#1]  119.25,50.04 0 top
U$137  [#TX##RX##0]  120.52,47.5 0 top
U$138  [#TX##RX##1]  120.52,47.5 0 bottom
U$139  [#GPIO1#0]  146.18,15.24 0 bottom
U$140  [#GPIO1_#2]  120.27,44.96 0 bottom
U$141  [#_GPIO1#2]  120.27,44.96 0 top
U$142  [V0]  130.17,11.18 90 bottom
U$143  [G3]  135.51,11.05 90 bottom
U$144  [D#2]  133.86,11.43 90 bottom
U$145  [D#1]  131.95,11.43 90 bottom
U$146  [VIN#_3#0V_MIN_5#0V_MAX0]  148.08,48.77 0 bottom
U$147  [3#3V_#_1000MA0]  148.08,44.32 0 bottom
U$148  [5#0V_#_600MA0]  148.08,42.42 0 bottom
VCC  TEST-POINT3X5  [PAD.03X.05]  11.94,19.56 0 bottom
VCC1  TEST-POINT3X5  [PAD.03X.05]  48.01,19.56 0 bottom
VCC2  TEST-POINT3X5  [PAD.03X.05]  84.07,19.56 0 bottom
VCC3  TEST-POINT3X5  [PAD.03X.05]  120.14,19.56 0 bottom
VHF  U.FL  [U.FL]  18.29,86.87 90 top
VHF1  U.FL  [U.FL]  54.36,86.87 90 top
VHF2  U.FL  [U.FL]  90.42,86.87 90 top
VHF3  U.FL  [U.FL]  126.49,86.87 90 top

## Library data of the parts
BYP BYP1-BYP3 GPIO1-GPIO4 RX_LED RX_LED1-RX_LED3 RXI RXI1-RXI3 TX_LED TX_LED1-TX_LED3 TXO TXO1-TXO3 = SparkFun-Jumpers
C1-C3 C7 C9 C11-C13 C15 C16 C21-C23 C25 C26 C31-C33 C35 C36 = SparkFun-Capacitors; PROD_ID: CAP-08604
C4 C5 C18 C19 C28 C29 C38 C39 = SparkFun-Capacitors; PROD_ID: CAP-12547
C6 C14 C24 C34 = SparkFun-Capacitors; PROD_ID: CAP-11015
C8 C20 C30 C40 = SparkFun-Capacitors; PROD_ID: CAP-13930
C10 C17 C27 C37 = SparkFun-Capacitors; PROD_ID: CAP-00867
D1 D4 D7 D10 = SparkFun-IC-Power; PROD_ID: DIO-14084
D2 D5 D8 D11 = SparkFun-LED; PROD_ID: DIO-00821
D3 D6 D9 D12 = SparkFun-LED; PROD_ID: DIO-09003
E1-E8 = SparkFun-RF; PROD_ID: CONN-08289
E$1-E$4 FD1-FD16 LOGO1-LOGO8 = SparkFun-Aesthetics
E$5 E$6 = SparkFun-Retired
F1-F4 = SparkFun-Fuses; PROD_ID: RES-14313
GPS GPS1-GPS3 VHF VHF1-VHF3 = SparkFun-Connectors; PROD_ID: CONN-09193; SF_ID: WRL-09144
H1-H4 H7-H10 H13-H16 H19-H22 = SparkFun-Hardware
H5 H6 H11 H12 H17 H18 H23 H24 = SparkFun-Hardware; PROD_ID: HW-14899
J1 J3 J5 J7 = SparkFun-Connectors; PROD_ID: CONN-14122
J2 J4 J6 J8 = SparkFun-Connectors; PROD_ID: CONN-09696
JP1-JP4 VCC VCC1-VCC3 = SparkFun-Connectors
Q1 Q3 Q6 Q8 Q10 Q12 Q14 Q16 = SparkFun-DiscreteSemi; PROD_ID: TRANS-14386
Q2 Q4 Q5 Q7 Q9 Q11 Q13 Q15 = SparkFun-DiscreteSemi; PROD_ID: TRANS-14388
R1 R2 R7 R8 R17 R18 R31 R32 = SparkFun-Resistors; PROD_ID: RES-12083
R3 R4 R13 R14 R27 R28 R37 R38 = SparkFun-Resistors; PROD_ID: RES-07863
R5 R6 R9 R11 R15 R16 R19 R21 R23 R25 R29 R30 R33 R35 R39 R40 = SparkFun-Resistors; PROD_ID: RES-07828
R10 R12 R20 R22 R24 R26 R34 R36 = SparkFun-Resistors; PROD_ID: RES-07868
U1 U4 U7 U10 = SparkFun-IC-Comms; PROD_ID: IC-14135
U2 U5 U8 U11 = Swarm; PROD_ID: CONN-16558
U3 U6 U9 U12 = SparkFun-IC-Power; PROD_ID: IC-15779
U$1 U$2 U$34 U$39 U$75 U$76 U$112 U$113 = SparkX
U$3-U$33 U$35-U$38 U$40-U$74 U$77-U$111 U$114-U$148 = output

## Nets
3.3V: C8.1 R5.2 U3.5
3.3V1: C20.1 R15.2 U6.5
3.3V2: C30.1 R29.2 U9.5
3.3V3: C40.1 R39.2 U12.5
CH340_RXI: D2.C TXO.2 TXO.4 U1.9
CH340_RXI1: D5.C TXO1.2 TXO1.4 U4.9
CH340_RXI2: D8.C TXO2.2 TXO2.4 U7.9
CH340_RXI3: D11.C TXO3.2 TXO3.4 U10.9
CH340_TXO: D3.C RXI.1 RXI.3 U1.8
CH340_TXO1: D6.C RXI1.1 RXI1.3 U4.8
CH340_TXO2: D9.C RXI2.1 RXI2.3 U7.8
CH340_TXO3: D12.C RXI3.1 RXI3.3 U10.8
D+: D1.6 U1.1
D+1: D4.6 U4.1
D+2: D7.6 U7.1
D+3: D10.6 U10.1
D+_IN: D1.1 J1.A6 J1.B6 JP1.D+
D+_IN1: D4.1 J3.A6 J3.B6 JP2.D+
D+_IN2: D7.1 J5.A6 J5.B6 JP3.D+
D+_IN3: D10.1 J7.A6 J7.B6 JP4.D+
D-: D1.4 U1.2
D-1: D4.4 U4.2
D-2: D7.4 U7.2
D-3: D10.4 U10.2
D-_IN: D1.3 J1.A7 J1.B7 JP1.D-
D-_IN1: D4.3 J3.A7 J3.B7 JP2.D-
D-_IN2: D7.3 J5.A7 J5.B7 JP3.D-
D-_IN3: D10.3 J7.A7 J7.B7 JP4.D-
GND: C1.2 C2.2 C3.2 C4.- C5.- C6.2 C7.2 C8.2 C9.2 C10.2 D1.2 E1.GND@0 E1.GND@1 E1.GND@2 E1.GND@3 E2.GND@0 E2.GND@1 E2.GND@2 E2.GND@3 GPS.1 GPS.2 H5.1 H6.1 J1.GND J1.GND2 J1.SHLD1 J1.SHLD2 J1.SHLD3 J1.SHLD4 J2.1 JP1.GND R1.1 R2.1 R6.1 R21.1 R22.1 R23.1 R24.1 U1.3 U2.4 U2.9 U2.15 U2.18 U2.21 U2.26 U2.27 U2.29 U2.34 U2.35 U2.37 U2.40 U2.43 U2.50 U2.A1 U2.A2 U3.2 VHF.1 VHF.2
GND1: C11.2 C12.2 C13.2 C14.2 C15.2 C16.2 C17.2 C18.- C19.- C20.2 D4.2 E3.GND@0 E3.GND@1 E3.GND@2 E3.GND@3 E4.GND@0 E4.GND@1 E4.GND@2 E4.GND@3 GPS1.1 GPS1.2 H11.1 H12.1 J3.GND J3.GND2 J3.SHLD1 J3.SHLD2 J3.SHLD3 J3.SHLD4 J4.1 JP2.GND R7.1 R8.1 R9.1 R10.1 R11.1 R12.1 R16.1 U4.3 U5.4 U5.9 U5.15 U5.18 U5.21 U5.26 U5.27 U5.29 U5.34 U5.35 U5.37 U5.40 U5.43 U5.50 U5.A1 U5.A2 U6.2 VHF1.1 VHF1.2
GND2: C21.2 C22.2 C23.2 C24.2 C25.2 C26.2 C27.2 C28.- C29.- C30.2 D7.2 E5.GND@0 E5.GND@1 E5.GND@2 E5.GND@3 E6.GND@0 E6.GND@1 E6.GND@2 E6.GND@3 GPS2.1 GPS2.2 H17.1 H18.1 J5.GND J5.GND2 J5.SHLD1 J5.SHLD2 J5.SHLD3 J5.SHLD4 J6.1 JP3.GND R17.1 R18.1 R19.1 R20.1 R25.1 R26.1 R30.1 U7.3 U8.4 U8.9 U8.15 U8.18 U8.21 U8.26 U8.27 U8.29 U8.34 U8.35 U8.37 U8.40 U8.43 U8.50 U8.A1 U8.A2 U9.2 VHF2.1 VHF2.2
GND3: C31.2 C32.2 C33.2 C34.2 C35.2 C36.2 C37.2 C38.- C39.- C40.2 D10.2 E7.GND@0 E7.GND@1 E7.GND@2 E7.GND@3 E8.GND@0 E8.GND@1 E8.GND@2 E8.GND@3 GPS3.1 GPS3.2 H23.1 H24.1 J7.GND J7.GND2 J7.SHLD1 J7.SHLD2 J7.SHLD3 J7.SHLD4 J8.1 JP4.GND R31.1 R32.1 R33.1 R34.1 R35.1 R36.1 R40.1 U10.3 U11.4 U11.9 U11.15 U11.18 U11.21 U11.26 U11.27 U11.29 U11.34 U11.35 U11.37 U11.40 U11.43 U11.50 U11.A1 U11.A2 U12.2 VHF3.1 VHF3.2
GPIO1: GPIO1.2 J2.3 U2.42
GPIO2: GPIO2.2 J4.3 U5.42
GPIO3: GPIO3.2 J6.3 U8.42
GPIO4: GPIO4.2 J8.3 U11.42
GPS: E2.SIG GPS.FEED
GPS1: E4.SIG GPS1.FEED
GPS2: E6.SIG GPS2.FEED
GPS3: E8.SIG GPS3.FEED
N$1: J3.B5 R7.2
N$2: J1.B5 R1.2
N$3: J1.A5 R2.2
N$4: J3.A5 R8.2
N$5: Q1.2 Q1.5 Q1.6 R21.2
N$6: C9.1 RX_LED.1 TX_LED.2 U1.10
N$7: R4.1 RX_LED.2
N$8: Q6.2 Q6.5 Q6.6 R9.2
N$9: D2.A R3.2
N$10: D3.A R4.2
N$11: Q5.1 Q6.3 R10.2
N$12: R3.1 TX_LED.1
N$13: Q1.3 Q2.1 R22.2
N$14: GPIO1.3 R5.1
N$15: Q3.2 Q3.5 Q3.6 R23.2
N$16: GPIO1.1 R6.2
N$17: Q8.2 Q8.5 Q8.6 R11.2
N$18: Q7.1 Q8.3 R12.2
N$19: C16.1 RX_LED1.1 TX_LED1.2 U4.10
N$20: D5.A R13.2
N$21: D6.A R14.2
N$22: R14.1 RX_LED1.2
N$23: R13.1 TX_LED1.1
N$24: GPIO2.3 R15.1
N$25: GPIO2.1 R16.2
N$26: J5.B5 R17.2
N$27: J5.A5 R18.2
N$28: Q3.3 Q4.1 R24.2
N$29: Q10.2 Q10.5 Q10.6 R19.2
N$30: Q9.1 Q10.3 R20.2
N$31: Q12.2 Q12.5 Q12.6 R25.2
N$32: Q11.1 Q12.3 R26.2
N$33: C26.1 RX_LED2.1 TX_LED2.2 U7.10
N$34: D8.A R27.2
N$35: D9.A R28.2
N$36: R28.1 RX_LED2.2
N$37: R27.1 TX_LED2.1
N$38: GPIO3.3 R29.1
N$39: GPIO3.1 R30.2
N$40: J7.B5 R31.2
N$41: J7.A5 R32.2
N$42: Q14.2 Q14.5 Q14.6 R33.2
N$43: Q13.1 Q14.3 R34.2
N$44: Q16.2 Q16.5 Q16.6 R35.2
N$45: Q15.1 Q16.3 R36.2
N$46: C36.1 RX_LED3.1 TX_LED3.2 U10.10
N$47: D11.A R37.2
N$48: D12.A R38.2
N$49: R38.1 RX_LED3.2
N$50: R37.1 TX_LED3.1
N$51: GPIO4.3 R39.1
N$52: GPIO4.1 R40.2
RXI: RXI.2 RXI.4 U2.11
RXI1: RXI1.2 RXI1.4 U5.11
RXI2: RXI2.2 RXI2.4 U8.11
RXI3: RXI3.2 RXI3.4 U11.11
TX/!RX!: J2.4 U2.17
TX/!RX!1: J4.4 U5.17
TX/!RX!2: J6.4 U8.17
TX/!RX!3: J8.4 U11.17
TXO: TXO.1 TXO.3 U2.13
TXO1: TXO1.1 TXO1.3 U5.13
TXO2: TXO2.1 TXO2.3 U8.13
TXO3: TXO3.1 TXO3.3 U11.13
V_USB: BYP.2 D1.5 F1.1 J1.VBUS1 J1.VBUS2 JP1.VBUS
V_USB1: BYP1.2 D4.5 F2.1 J3.VBUS1 J3.VBUS2 JP2.VBUS
V_USB2: BYP2.2 D7.5 F3.1 J5.VBUS1 J5.VBUS2 JP3.VBUS
V_USB3: BYP3.2 D10.5 F4.1 J7.VBUS1 J7.VBUS2 JP4.VBUS
V_USB_1: BYP1.1 C11.1 C17.1 F2.2 Q5.3 Q6.1 U4.7
V_USB_2: BYP.1 C1.1 C10.1 F1.2 Q1.1 Q2.3 U1.7
V_USB_3: BYP2.1 C21.1 C27.1 F3.2 Q9.3 Q10.1 U7.7
V_USB_4: BYP3.1 C31.1 C37.1 F4.2 Q13.3 Q14.1 U10.7
VCC: C3.1 C4.+ C5.+ C6.1 C7.1 Q1.4 Q2.2 Q3.4 Q4.2 U2.2 U2.39 U2.41 U2.52 U3.1 U3.3 VCC.1
VCC1: C13.1 C14.1 C15.1 C18.+ C19.+ Q5.2 Q6.4 Q7.2 Q8.4 U5.2 U5.39 U5.41 U5.52 U6.1 U6.3 VCC1.1
VCC2: C23.1 C24.1 C25.1 C28.+ C29.+ Q9.2 Q10.4 Q11.2 Q12.4 U8.2 U8.39 U8.41 U8.52 U9.1 U9.3 VCC2.1
VCC3: C33.1 C34.1 C35.1 C38.+ C39.+ Q13.2 Q14.4 Q15.2 Q16.4 U11.2 U11.39 U11.41 U11.52 U12.1 U12.3 VCC3.1
VHF: E1.SIG VHF.FEED
VHF1: E3.SIG VHF1.FEED
VHF2: E5.SIG VHF2.FEED
VHF3: E7.SIG VHF3.FEED
VIN: C2.1 J2.2 Q3.1 Q4.3
VIN1: C12.1 J4.2 Q7.3 Q8.1
VIN2: C22.1 J6.2 Q11.3 Q12.1
VIN3: C32.1 J8.2 Q15.3 Q16.1